# Altium PCB PCB1.PcbDoc
Units mil, origin at the board's own origin, x right, y up, seen from the top; angles counter-clockwise.
Board outline 2310 x 2715 mil, 2 copper layers (Top Layer, Bottom Layer); 65 components, 55 nets, 271 pads, 54 vias.
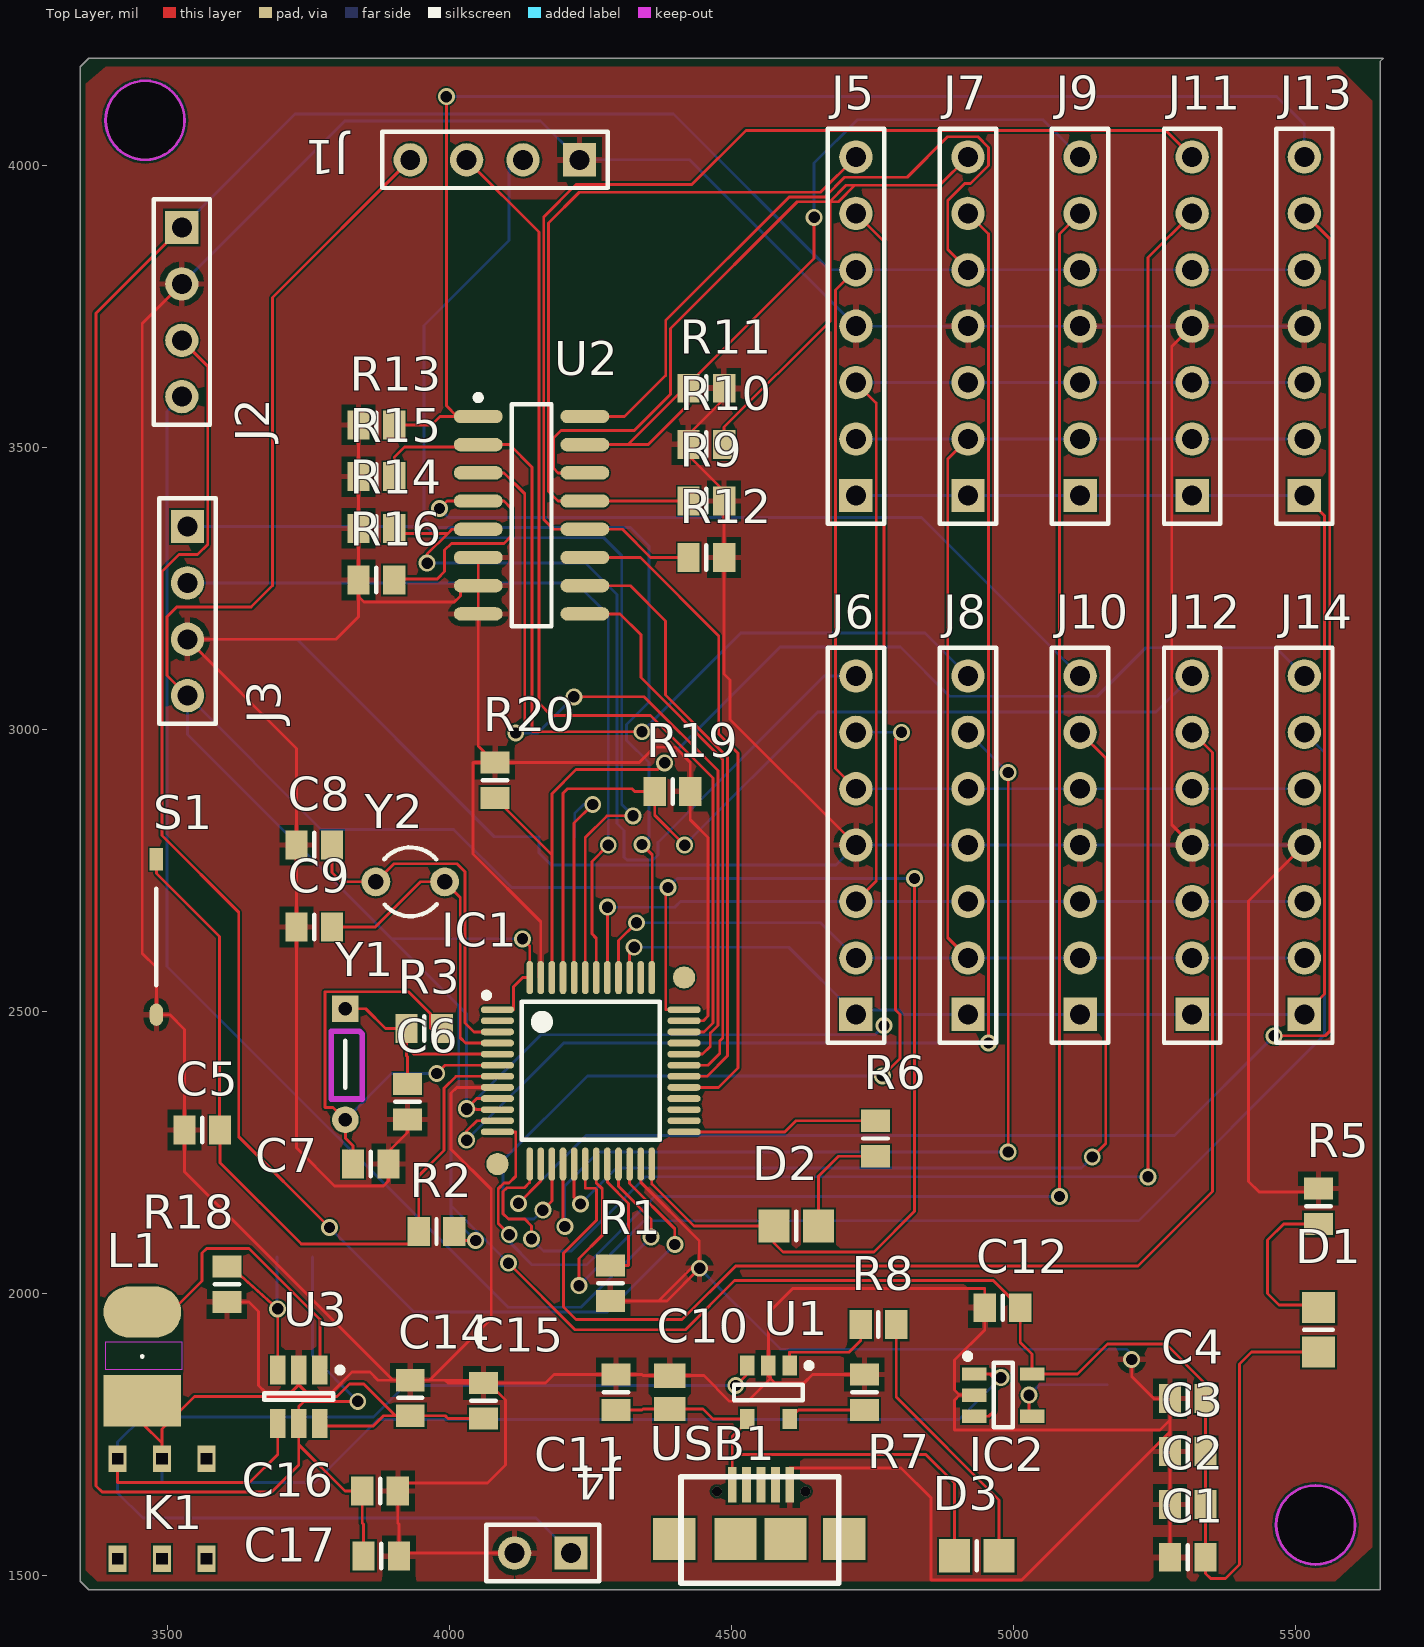
[diagram p0: Top Layer view]
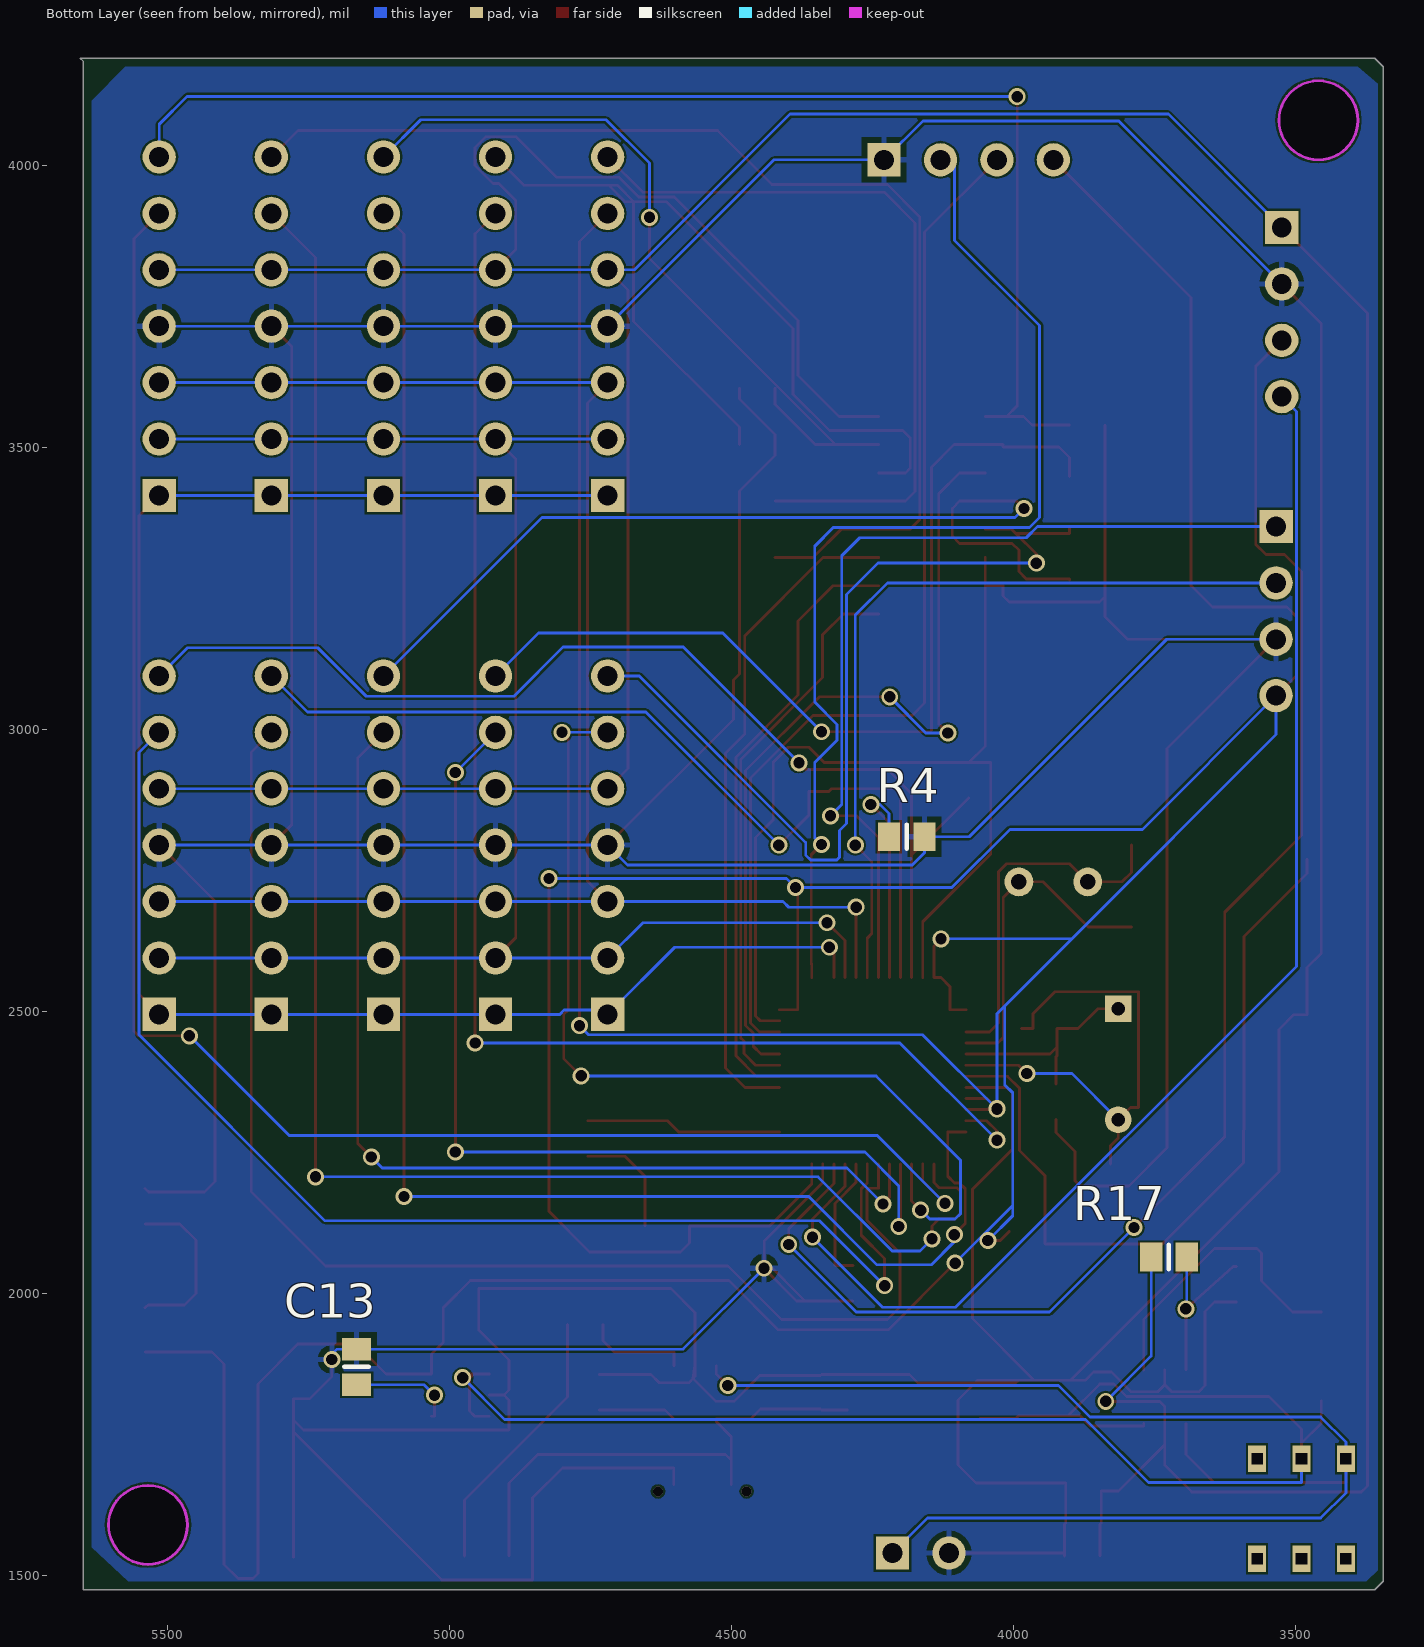
[diagram p1: Bottom Layer view, seen from below]

## Layer stack, top to bottom
Top Solder: solder mask 0.4, Solder Resist, Dk 3.5
Top Layer: signal copper 1.4
Dielectric 1: dielectric 12.6, FR-4, Dk 4.8
Bottom Layer: signal copper 1.4
Bottom Solder: solder mask 0.4, Solder Resist, Dk 3.5

## Board outline
3345,1490 3345,4175 3360,4190 5655,4190 5650,4185 5650,1475 3360,1475

## Design rules (kind name [scope] priority, off if disabled: settings)
Clearance [All] p1: gap=3.5 ignorepadtopadclearanceinfootprint=TRUE except(0: Arc-Hole Track-Hole SMDPad-Hole THPad-Hole Via-Hole Fill-Hole Poly-Hole Region-Hole Text-Hole; 10: Arc-SMDPad Arc-Via Track-SMDPad Track-Via SMDPad-Via Via-Via)
PolygonConnect [All] p1: connectstyle=Relief reliefconductorwidth=10 reliefentries=4 polygonreliefangle="90 Angle" airgapwidth=10
RoutingVias [All] p1: holewidth=20 width=30 viastyle="Through Hole" minholewidth=15 minwidth=30 maxholewidth=20 maxwidth=50
SolderMaskExpansion [All] p1: expansion=4
Width Width_2 [All] p1: maxlimit=5 minlimit=5 preferedwidth=5 minimp=50.000000 maximp=50.000000 favimp=50.000000
30 further rules are at their usual default settings.

## Components (designator, comment, footprint, x,y, rotation, side; value= is the part's Value field where it differs from the comment)
C1 "Cap Semi" 6-0805_L 5308.5,1532.5 r0 top value=104
C2 "Cap Semi" 6-0805_L 5308.5,1626.25 r0 top value=1uf
C3 "Cap Semi" 6-0805_L 5308.5,1720 r0 top value=104
C4 "Cap Semi" 6-0805_L 5308.5,1813.75 r0 top value=104
C5 "Cap Semi" 6-0805_L 3561.5,2290 r0 top value=104
C6 "Cap Semi" 6-0805_L 3925,2340 r90 top value=22pF
C7 "Cap Semi" 6-0805_L 3860,2230 r180 top value=22pF
C8 "Cap Semi" 6-0805_L 3760,2795 r0 top value=22pF
C9 "Cap Semi" 6-0805_L 3760,2650 r0 top value=22pF
C10 "Cap Pol3" C0805 4390,1825 r90 top value=1uF
C11 "Cap Semi" 6-0805_L 4295,1825 r270 top value=104
C12 "Cap Semi" 6-0805_L 4980,1975 r0 top value=2.2uF
C13 "Cap Semi" 6-0805_L 5165,1870 r270 bottom value=470pF
C14 "Cap Semi" 6-0805_L 3930,1815 r270 top value=10uF
C15 "Cap Semi" 6-0805_L 4060,1810 r270 top value=0.1uF
C16 "Cap Semi" 6-0805_L 3876.5,1650 r180 top value=0.1uf
C17 "Cap Semi" 6-0805_L 3878.5,1535 r180 top value=22uf
D1 "LED" 6-0805_M 5540,1935.63 r90 top
D2 "LED" 6-0805_M 4614.37,2120 r0 top
D3 "LED" 6-0805_M 4934.37,1535 r0 top
IC1 "STM32F103C8T6" LQFP48 4250,2395 r0 top
IC2 "MIC5205-3.3" SOT-23-5 4981.18,1820 r0 top
J1 "CON4" HDR1X4 4230,4010 r180 top
J2 "蓝牙" HDR1X4 3525,3890 r270 top
J3 "MPU6050" HDR1X4 3535,3360 r270 top
J4 "BAT" HDR1X2 4215,1540 r180 top
J5 "CON7" HDR1X7 4720,3415 r90 top
J6 "CON7" HDR1X7 4720,2495 r90 top
J7 "CON7" HDR1X7 4918.75,3415 r90 top
J8 "CON7" HDR1X7 4918.75,2495 r90 top
J9 "CON7" HDR1X7 5117.5,3415 r90 top
J10 "CON7" HDR1X7 5117.5,2495 r90 top
J11 "CON7" HDR1X7 5316.25,3415 r90 top
J12 "CON7" HDR1X7 5316.25,2495 r90 top
J13 "CON7" HDR1X7 5515,3415 r90 top
J14 "CON7" HDR1X7 5515,2495 r90 top
K1 "BUTTON" switch 3568.74,1707.17 r270 top
L1 "10UH" 0850 3455,1810 r90 top
R1 "Res3" 6-0805_L 4285,2018.5 r270 top value=10K
R2 "Res3" 6-0805_L 3976.5,2110 r0 top value=10K
R3 "Res3" 6-0805_L 3955,2470 r0 top value=10M
R4 "Res3" 6-0805_L 4190,2810 r0 bottom value=10K
R5 "Res3" 6-0805_L 5540,2155 r270 top value=1K
R6 "Res3" 6-0805_L 4755,2275 r270 top value=1K
R7 "Res3" 6-0805_L 4735,1825 r90 top value=330
R8 "Res3" 6-0805_L 4760,1945 r0 top value=330
R9 "Res3" 6-0805_L 4455,3405 r180 top value=10K
R10 "Res3" 6-0805_L 4455,3505 r0 top value=10K
R11 "Res3" 6-0805_L 4455,3605 r180 top value=10K
R12 "Res3" 6-0805_L 4455,3305 r180 top value=10K
R13 "Res3" 6-0805_L 3870,3540 r0 top value=10K
R14 "Res3" 6-0805_L 3870,3356.67 r0 top value=10K
R15 "Res3" 6-0805_L 3870,3448.33 r0 top value=10K
R16 "Res3" 6-0805_L 3870,3265 r0 top value=10K
R17 "Res3" 6-0805_L 3725,2065 r180 bottom value=525K
R18 "Res3" 6-0805_L 3605,2016.5 r270 top value=100k
R19 "Res3" 6-0805_L 4395,2890 r180 top value=10K
R20 "Res3" 6-0805_L 4080,2910 r270 top value=10K
S1 "KEY_2P" SOP2 3480,2770 r270 top
U1 "PW4054" SOT-23-CT5_L 4565,1825 r270 top
U2 "CD4051BCM" M16A_N 4145,3380 r0 top
U3 "PS7516" SOT23-6_M 3732.4,1817.24 r270 top
USB1 "MICRO USB" "MICRO USB" 4548.74,1613.23 r0 top
Y1 "XTAL_8M" xtal 3815,2505 r270 top
Y2 "XTAL_32.768K" R38 3930,2730 r90 top

## Footprints (in the part's own frame and the unit in brackets; to place one, negate y for a bottom-side part, rotate by r counter-clockwise, add the part's x,y. Pads: shape width x height; smd on the part's side, far side on the other; paste and mask are expansions set on the pad)
6-0805_L [mm] "Chip Resistor, Body 2.0x1.2mm, IPC High Density"
  rect 1x1.3 smd: 1(-0.8,0) 2(0.8,0)
  silkscreen extent 0,-0.55 0,0.55, body extent -1.07,-0.7 1.07,0.7, height 0.7
6-0805_M [mm] "Chip Resistor, Body 2.0x1.2mm, IPC Low Density"
  rect 1.4x1.5 smd: 1(-1,0) 2(1,0)
  silkscreen extent 0,-0.65 0,0.65, body extent -1.07,-0.7 1.07,0.7, height 0.7
0850 [mm]
  rect 2.3x3.5 smd: 1(0,0)
  oval 2.3x3.5 smd: 2(4,0)
  silkscreen extent 1.99,0 2.01,0
C0805 [mm] "Chip Capacitor, Body 2.0x1.3mm, IPC High Density"
  rect 1.1x1.4 smd: 1(-0.75,0) 2(0.75,0)
  body extent -1.1,-0.72 1.1,0.72, height 1.4
HDR1X2 [mm] "Connector; Header; 2 Position"
  rect 1.5x1.5 hole 0.9: 1(0,0)
  round 1.5 hole 0.9: 2(2.54,0)
  silkscreen extent -1.27,-1.27 3.81,1.27
HDR1X4 [mm] "Connector; Header; 4 Position"
  rect 1.5x1.5 hole 0.9: 1(0,0)
  round 1.5 hole 0.9: 2(2.54,0) 3(5.08,0) 4(7.62,0)
  silkscreen extent -1.27,-1.27 8.89,1.27, body extent -1.27,-1.27 8.89,1.27, height 8.38
HDR1X7 [mm] "Connector; Header; 7 Position"
  rect 1.5x1.5 hole 0.9: 1(0,0)
  round 1.5 hole 0.9: 2(2.54,0) 3(5.08,0) 4(7.62,0) 5(10.16,0) 6(12.7,0) 7(15.24,0)
  silkscreen extent -1.27,-1.27 16.51,1.27
LQFP48 [mm]
  oval 1.5x0.3 smd: 1(-4.2,2.75) 2(-4.2,2.25) 3(-4.2,1.75) 4(-4.2,1.25) 5(-4.2,0.75) 6(-4.2,0.25) 7(-4.2,-0.25) 8(-4.2,-0.75) 9(-4.2,-1.25) 10(-4.2,-1.75) 11(-4.2,-2.25) 12(-4.2,-2.75) 25(4.2,-2.75) 26(4.2,-2.25) 27(4.2,-1.75) 28(4.2,-1.25) 29(4.2,-0.75) 30(4.2,-0.25) 31(4.2,0.25) 32(4.2,0.75) 33(4.2,1.25) 34(4.2,1.75) 35(4.2,2.25) 36(4.2,2.75)
  oval 0.3x1.5 smd: 13(-2.75,-4.2) 14(-2.25,-4.2) 15(-1.75,-4.2) 16(-1.25,-4.2) 17(-0.75,-4.2) 18(-0.25,-4.2) 19(0.25,-4.2) 20(0.75,-4.2) 21(1.25,-4.2) 22(1.75,-4.2) 23(2.25,-4.2) 24(2.75,-4.2) 37(2.75,4.2) 38(2.25,4.2) 39(1.75,4.2) 40(1.25,4.2) 41(0.75,4.2) 42(0.25,4.2) 43(-0.25,4.2) 44(-0.75,4.2) 45(-1.25,4.2) 46(-1.75,4.2) 47(-2.25,4.2) 48(-2.75,4.2)
  round 1 smd: 49(-4.2,-4.2) 50(4.2,4.2)
  silkscreen extent -4.82,-3.1 3.1,3.52, body extent -4.49,-4.5 4.5,4.5, height 1.6
M16A_N [mm] "SOIC, 16-Leads, Body 9.9x3.9mm, Pitch 1.27mm, IPC Medium Density"
  oval 2.2x0.6 smd: 1(-2.4,4.445) 2(-2.4,3.175) 3(-2.4,1.905) 4(-2.4,0.635) 5(-2.4,-0.635) 6(-2.4,-1.905) 7(-2.4,-3.175) 8(-2.4,-4.445) 9(2.4,-4.445) 10(2.4,-3.175) 11(2.4,-1.905) 12(2.4,-0.635) 13(2.4,0.635) 14(2.4,1.905) 15(2.4,3.175) 16(2.4,4.445)
  silkscreen extent -2.52,-5 0.9,5.42, body extent -2,-5 2,5, height 1.75
"MICRO USB" [mm]
  rect 0.4x1.6 smd: 1(-1.216,1.214) 2(-0.575,1.225) 3(0.075,1.225) 4(0.725,1.225) 5(1.375,1.225)
  rect 1.9x1.9 smd: ""(-3.825,-1.225) ""(-1.075,-1.225) ""(1.175,-1.225) ""(3.825,-1.225)
  silkscreen extent -3.53,-3.22 3.57,1.58, body extent -4.43,-3.77 4.38,1.82, height 2.54
R38 [mm] "Crystal, Thru-Hole; 2 Leads; Body 3.1 x 8.2 mm (Dia.xH)"
  round 1.3 hole 0.7: 1(0,1.55) 2(0,-1.55)
  silkscreen extent -1.55,-1.19 1.55,1.17
SOP2 [mm]
  rect 1x0.6 smd: 1(0,0)
  oval 1x0.6 smd: 2(7,0)
  silkscreen extent 1.34,0 5.67,0
SOT23-6_M [mm] "SOT23, 6-Leads, Body 2.9x1.6mm, Pitch 0.95mm, Lead Span 2.7mm, IPC Low Density"
  rect 1.3x0.7 smd: 1(-1.2,0.95) 2(-1.2,0) 3(-1.2,-0.95) 4(1.2,-0.95) 5(1.2,0) 6(1.2,0.95)
  silkscreen extent -1.32,-1.55 0.15,1.98, body extent -0.9,-1.55 0.9,1.55, height 1.45
SOT-23-5 [mm]
  rect 1.1x0.6 smd: 1(-1.3,0.95) 2(-1.3,0) 3(-1.3,-0.95) 4(1.3,-0.95) 5(1.3,0.95)
  silkscreen extent -1.72,-1.45 0.42,1.87, body extent -1.37,-1.45 1.43,1.45, height 1.45
SOT-23-CT5_L [mm] "SOT23, 5-Leads, Body 2.9x1.6mm, Pitch 0.95mm, Lead Span 2.7mm, IPC High Density"
  rect 0.9x0.65 smd: 1(-1.2,0.95) 2(-1.2,0) 3(-1.2,-0.95) 4(1.2,-0.95) 5(1.2,0.95)
  silkscreen extent -1.32,-1.55 0.35,1.95, body extent -0.9,-1.55 0.9,1.55, height 1.45
switch [mm]
  rect 1.2x0.8 hole 0.5 square: 1(0,0) 2(0,-2) 3(0,-4) 4(4.5,0) 5(4.5,-2) 6(4.5,-4)
xtal [mm]
  rect 1.2x1.2 hole 0.6: 1(0,0)
  round 1.2 hole 0.6: 2(5,0)
  silkscreen extent 1.43,0 3.56,0

## Part data
C1 C2 C3 C4 C5 C6 C7 C8 C9 C11 C12 C13 C14 C15 C16 C17: "Capacitor (Semiconductor SIM Model)", LatestRevisionDate=29-May-2009, LatestRevisionNote="IPC-7351 Footprint Added.", PackageDescription="Chip Capacitor", PackageReference=C1206, Published=8-Jun-2000, Publisher="Altium Limited"
C10: "Polarized Capacitor (Surface Mount)", LatestRevisionDate=29-May-2009, LatestRevisionNote="IPC-7351 Footprint Added.", PackageDescription="Chip Capacitor", PackageReference=C0805, Published=8-Jun-2000, Publisher="Altium Limited"
IC1: "单片机", ComponentLink1Description="Manufacturer Link", ComponentLink1URL=www.st.com/stm32, ComponentLink2Description=Datasheet, ComponentLink2URL=http://www.st.com/stonline/products/literature/ds/13587.pdf, DatasheetVersion="rev6, Mar-2008", PackageDescription="48-Pin Low-Profile Quad Flat Pack, 7 x 7 mm Body, 0.5 mm Pitch (LQFP48)", PackageReference=LQFP48, PackageVersion=Mar-2008, Published=30-May-2008, Publisher="Altium Limited"
IC2: "稳压"
J1: "连接器"
J2 J3: library part CON4, "Connector"
J4: library part CON2, "Conjunctor"
J5 J6 J7 J8 J9 J10 J11 J12 J13 J14: "Connector"
K1: "自锁按键"
L1: library part Inductor, "电感"
R1 R2 R3 R4 R5 R6 R7 R8 R9 R10 R11 R12 R13 R14 R15 R16 R17 R18 R19 R20: "Resistor", LatestRevisionDate=29-May-2009, LatestRevisionNote="IPC-7351 Footprint Added.", PackageDescription="Chip Resistor", PackageReference=J1-0603, Published=8-Jun-2000, Publisher="Altium Limited"
S1: "轻触按键2P"
U2: "8-Channel Analog Multiplexer/Demultiplexer", Code_IPC=SOIC127P600-16, ComponentLink1Description="Manufacturer Link", ComponentLink1URL=http://www.fairchildsemi.com/, ComponentLink2Description=Datasheet, ComponentLink2URL=http://www.fairchildsemi.com/ds/CD%2FCD4052BC.pdf, DatasheetVersion=Jan-1999, LatestRevisionDate=13-Apr-2006, LatestRevisionNote="IPC-7351 Footprint Added.", PackageDescription="16-Pin Small Outline Integrated Circuit 1.27 mm Pitch", PackageReference=M16A, PackageVersion=2000, Published=17-Jul-2002, Publisher="Altium Limited"
Y1 Y2: library part XTAL, "Crystal Oscillator", LatestRevisionDate=17-Jul-2002, LatestRevisionNote="Re-released for DXP Platform.", PackageDescription="Crystal, Thru-Hole; 2 Leads; Body 3.1 x 8.2 mm (Dia.xH)", PackageReference=R38, Published=8-Jun-2000, Publisher="Altium Limited"

## Free pads (board coordinates)
  rect 47.24x31.5 hole 140: ""(3460,4080) ""(5535,1590)

## Via types
v1: diameter 30, hole 20, Top Layer to Bottom Layer, 52 vias
v2: diameter 17.72, hole 17.72, Top Layer to Bottom Layer, 2 vias

## Nets (pads, with @x,y where several pads share a name; then routed paths per layer and width w, separated by ;. In a path a pad name is that pad's centre, name@x,y a point inside that pad or via, vN(x,y) a via of type N, cw(c..) or ccw(c..) an arc to the next point about the centre after c; other vN are vias at no path point)
+5: C16.2 C17.2 J2.1 J5.5 J6.5 J7.5 J8.5 J9.5 J10.5 J11.5 J12.5 J13.5 J14.5 R17.1 U2.16 U3.5 | length 8627.4
  Top Layer w5: J2.1 3373,3738 3373,1659 3384,1648 3684.4,1648 3732.4,1696 3732.4,1732 ; v1(3837,1809) 3741.4,1809 3732.4,1800 U3.5 3732.4,1732 ; C17.2 3847.01,1591 3845,1593.01 C16.2 3814.4,1650 3732.4,1732 ; U2.16 4310,3555 4382.82,3627.82 4382.82,3724.82 4602,3944 4665,3944 4700,3979 4811,3979 4883,4051 4936,4051 4955,4032 4955,4000 4923,3968 4913,3968 4883,3938 4883,3850.75 J7.5 ; J6.5 4684,2931 4684,3779 J5.5
  Bottom Layer w5: J2.1 3726,4091 4396.74,4091 4672.74,3815 J5.5 J7.5 J9.5 J11.5 J13.5 ; R17.1 3756.5,1889.5 v1(3837,1809) ; J6.5 J8.5 J10.5 J12.5 J14.5
ADC0: IC1.10 J5.6 | length 2317
  Top Layer w5: v1(4030,2327) 4046,2327 4046.9,2326.1 IC1.10 ; J5.6 4770,3865 v1(4770,2475)
  Bottom Layer w5: v1(4030,2327) 4162,2459 4754,2459 v1(4770,2475)
ADC1: IC1.11 J7.6 | length 2560.5
  Top Layer w5: v1(4030,2272) 4030,2288 4048.42,2306.42 IC1.11 ; J7.6 4955,3878.75 v1(4955,2444.1)
  Bottom Layer w5: v1(4030,2272) 4202.1,2444.1 v1(4955,2444.1)
ADC2: IC1.12 J9.6 | length 3054.1
  Top Layer w5: IC1.12 4117,2286.73 4117,2208 4105,2196 4096,2196 4086,2186 4086,2124 v1(4105.5,2104.5) ; v1(5081,2172) 5081,3878.5 J9.6
  Bottom Layer w5: v1(4105.5,2104.5) 4105.5,2091.88 4146.38,2051 4242.5,2051 4363.5,2172 v1(5081,2172)
ADC3: IC1.13 J11.6 | length 3105.2
  Top Layer w5: IC1.13 4141.73,2197 4132.23,2187.5 4101,2187.5 4094.5,2181 4094.5,2141.5 4104,2132 4133,2132 4145,2120 v1(4145,2097) ; v1(5238,2207) 5238,3836.75 J11.6
  Bottom Layer w5: v1(4145,2097) 4166.5,2075.5 4215.5,2075.5 4347,2207 v1(5238,2207)
ADC4: IC1.14 J13.6 | length 3118.9
  Top Layer w5: v1(4122,2160) 4161.42,2199.42 IC1.14 ; v1(5461.57,2457) 5552,2457 5560,2465 5560,3870 J13.6
  Bottom Layer w5: v1(4122,2160) 4242,2280 5284.57,2280 v1(5461.57,2457)
ADC5: IC1.15 J6.6 | length 1709.6
  Top Layer w5: v1(4165.1,2148) 4181.1,2164 IC1.15 ; v1(4767,2386) 4798,2417 4798,2495 4790,2503 4790,2984 v1(4801,2995)
  Bottom Layer w5: v1(4165.1,2148) 4149.1,2132 4104,2132 4094.5,2141.5 4094.5,2236.5 4244,2386 v1(4767,2386) ; J6.6 v1(4801,2995)
ADC6: IC1.16 J8.6 | length 1768.3
  Top Layer w5: IC1.16 4200.79,2122.21 v1(4204,2119) ; v1(4990,2251) v1(4990,2923.75)
  Bottom Layer w5: v1(4204,2119) 4204,2191 4264,2251 v1(4990,2251) ; J8.6 v1(4990,2923.75)
ADC7: IC1.17 J10.6 | length 1798.6
  Top Layer w5: IC1.17 4220.47,2170.53 v1(4232,2159) ; J10.6 5163,2949.5 5163,2266 v1(5139,2242)
  Bottom Layer w5: v1(4232,2159) 4295.74,2222.74 5119.74,2222.74 v1(5139,2242)
ADC8: IC1.18 J12.6 | length 2378.3
  Top Layer w5: IC1.18 4240.16,2186.92 4257.25,2186.92 4260,2184.18 4260,2130 4201.5,2071.5 4201.5,1976.5 4224,1954 4412,1954 4507,2049 5220,2049 5352,2181 5352,2959.25 J12.6
ADC9: IC1.19 J14.6 | length 2294.4
  Top Layer w5: v1(4229,2014) 4229,2062 4270.41,2103.41 4270.41,2185.79 4259.84,2196.36 IC1.19
  Bottom Layer w5: v1(4229,2014) 4344,2129 5221,2129 5551,2459 5551,2959 J14.6
Address_0: IC1.29 U2.11 | length 1185.1
  Top Layer w5: U2.11 4338,3305 4477,3166 4477,2992 4511,2958 4511,2400 4476.47,2365.47 IC1.29
Address_1: IC1.30 U2.10 | length 1077.6
  Top Layer w5: U2.10 4320,3255 4382.42,3192.58 4382.42,3060.92 4492.5,2950.84 4492.5,2421.69 4455.97,2385.16 IC1.30
Address_2: IC1.31 U2.9 | length 991.4
  Top Layer w5: U2.9 4302,3205 4339,3168 4339,3092.09 4484,2947.09 4484,2453.12 4478.59,2447.71 4478.59,2425.59 4457.84,2404.84 IC1.31
Address_3: IC1.39 J5.1 J6.1 J7.1 J8.1 J9.1 J10.1 J11.1 J12.1 J13.1 J14.1 | length 3045.3
  Top Layer w5: IC1.39 4318.9,2605.9 v1(4327,2614) ; J14.1 5551,2531 5551,3379 J13.1
  Bottom Layer w5: v1(4327,2614) 4601,2614 J6.1 4727.5,2502.5 4797.5,2502.5 4805,2495 J8.1 J10.1 J12.1 J14.1 ; J5.1 J7.1 J9.1 J11.1 J13.1
Address_4: IC1.40 J5.2 J6.2 J7.2 J8.2 J9.2 J10.2 J11.2 J12.2 J13.2 J14.2 | length 3064.8
  Top Layer w5: IC1.40 4299.21,2625.71 v1(4331,2657.5) ; J8.2 4883,2630.75 4883,3479.25 J7.2
  Bottom Layer w5: v1(4331,2657.5) 4657.5,2657.5 J6.2 J8.2 J10.2 J12.2 J14.2 ; J5.2 J7.2 J9.2 J11.2 J13.2
Address_5: IC1.41 J5.3 J6.3 J7.3 J8.3 J9.3 J10.3 J11.3 J12.3 J13.3 J14.3 | length 3109.1
  Top Layer w5: IC1.41 v1(4279.53,2685) ; J6.3 4756,2731 4756,3579 J5.3
  Bottom Layer w5: v1(4279.53,2685) 4399,2685 4409,2695 J6.3 J8.3 J10.3 J12.3 J14.3 ; J5.3 J7.3 J9.3 J11.3 J13.3
BAT: J4.1 K1.3 U1.3 U3.4 | length 2508.5
  Top Layer w5: K1.3@3411.26,1695 3411.26,1665 3645,1665 3695,1715 U3.4 ; v1(4507,1837) 4527.6,1857.6 U1.3
  Bottom Layer w5: J4.1 4153,1602 3456,1602 3411.26,1646.74 3411.26,1695 3411.26,1736.76 3456,1781.5 3865,1781.5 3920.5,1837 v1(4507,1837)
BAT+: C14.2 C15.2 IC2.1 IC2.3 K1.2 L1.1 U3.6 | length 2680.6
  Top Layer w5: L1.1 3455,1770 3490,1735 ; K1.2@3490,1695 3490,1735 ; U3.6 3769.8,1765.5 3864.5,1765.5 3882.5,1783.5 3904,1783.5 ; C15.2 3997,1778.5 3992,1783.5 C14.2 3904,1783.5 ; IC2.3 4955.6,1782.6 4965,1792 4965,1849.4 4957,1857.4 ; IC2.1 4957,1857.4 ; v1(4977,1851) 4970.6,1857.4 4957,1857.4 ; 3490,1735 3490,1760 3547.5,1817.5 3800,1817.5 3822.5,1840 3847.5,1840 3904,1783.5
  Bottom Layer w5: K1.2@3490,1695 3490,1665 3761,1665 3873,1777 4903,1777 v1(4977,1851)
BOOT0: IC1.44 R4.2 | length 400
  Top Layer w5: IC1.44 4220.47,2833.98 v1(4253.5,2867)
  Bottom Layer w5: R4.2 4221.5,2851 4237.5,2867 v1(4253.5,2867)
BOOT1: IC1.20 R1.1 | length 227.2
  Top Layer w5: IC1.20 4279.53,2197.47 4317,2160 4317,2050 R1.1
Common_Out: IC1.32 U2.3 | length 1514.3
  Top Layer w5: U2.3 4096,3455 4133,3418 4133,3010 v1(4117,2994) ; v1(4220,3058) 4344.69,3058 4475.5,2927.19 4475.5,2475.5 4462,2462 4462,2438.53 4448,2424.53 IC1.32
  Bottom Layer w5: v1(4117,2994) 4156,2994 v1(4220,3058)
EX0: J5.7 R9.2 U2.13 | length 1324.9
  Top Layer w5: R9.2 U2.13 4192,3405 4175.18,3421.82 4175.18,3898.18 4229.5,3952.5 4657.5,3952.5 J5.7
EX1: J7.7 R10.2 U2.14 | length 1687.5
  Top Layer w5: U2.14 4192,3455 4183.68,3463.32 4183.68,3516.68 4197,3530 4327,3530 4391.32,3594.32 4391.32,3710.82 4616,3935.5 4674,3935.5 ; R10.2 4486.5,3536 4674,3723.5 4674,3935.5 ; J7.7 4868.75,3965 4718.5,3965 ; 4674,3935.5 4674,3936 4703,3965 4718.5,3965 ; 4674,3935.5 4689,3935.5 4718.5,3965
EX2: J9.7 R11.2 U2.15 | length 1408.6
  Top Layer w5: U2.15 4316,3505 ; R11.2 4423.5,3576.5 4352,3505 4316,3505 ; v1(4646,3908) 4646,3835 4316,3505
  Bottom Layer w5: v1(4646,3908) 4646,4004 4723,4081 5051.5,4081 J9.7
EX3: J11.7 R12.2 U2.12 | length 2053.6
  Top Layer w5: R12.2 4356,3305 4306,3355 U2.12 4184,3355 4166.68,3372.32 4166.68,3908.68 4224,3966 4429,3966 4525,4062 5269.25,4062 J11.7
EX4: J13.7 R13.2 U2.1 | length 2329.4
  Top Layer w5: R13.2 3968,3540 3983,3555 U2.1@4013,3555 ; v1(3994,4122) 3994,3574 U2.1@4013,3555 ; U2.1 U2.1@4013,3555
  Bottom Layer w5: v1(3994,4122) 5466,4122 5515,4073 J13.7
EX5: J6.7 R14.2 U2.5 | length 1621.1
  Top Layer w5: R14.2 3901.5,3347.69 3996.69,3347.69 ; v1(3960,3295) 3960,3311 3996.69,3347.69 ; U2.5 4004,3355 3996.69,3347.69
  Bottom Layer w5: v1(3960,3295) 4241,3295 4296.5,3239.5 4296.5,2833.5 4309,2821 4309,2773.5 4314,2768.5 4360,2768.5 4369,2777.5 4369,2800 4664,3095 J6.7
EX6: J8.7 R15.2 U2.2 | length 1651.4
  Top Layer w5: R15.2 3901.5,3482.5 3920,3501 4019,3501 4019,3505 U2.2 4106,3505 4146,3465 4146,2998 4148,2996 v1(4341,2996)
  Bottom Layer w5: v1(4341,2996) 4516,3171 4842.75,3171 J8.7
EX7: J10.7 R16.2 U2.4 | length 1708.5
  Top Layer w5: R16.2 3901.5,3267 3978,3267 3991,3280 3991,3318 4003,3330 4096,3330 4109,3343 4109,3392 4096,3405 U2.4 3995,3405 v1(3982,3392)
  Bottom Layer w5: v1(3982,3392) 3998,3376 4836.5,3376 J10.7
EX8: IC1.45 J12.7 R19.2 | length 1635.7
  Top Layer w5: IC1.45 4200.79,2887.04 4208.74,2895 4323,2895 4328,2890 R19.2 4363.5,2848 v1(4416.5,2795)
  Bottom Layer w5: v1(4416.5,2795) 4652.5,3031 5252.25,3031 J12.7
EX9: IC1.46 J14.7 R20.2 | length 2002.6
  Top Layer w5: R20.2 4181.1,2777.4 ; IC1.46 4181.1,2777.4 ; v1(4381,2941) 4369,2929 4224,2929 4181.1,2886.1 4181.1,2777.4
  Bottom Layer w5: v1(4381,2941) 4586,3146 4799,3146 4886,3059 5148,3059 5234,3145 5465,3145 J14.7
GND: C1.1 C2.1 C3.1 C4.1 C5.1 C6.1 C7.1 C8.1 C9.1 C10.2 C11.1 C12.1 C13.1 C14.1 C15.1 C16.1 C17.1 IC1.8 IC1.23 IC1.35 IC1.47 IC2.2 J1.1 J2.2 J3.3 J4.2 J5.4 J6.4 J7.4 J8.4 J9.4 J10.4 J11.4 J12.4 J13.4 J14.4 R1.2 R4.1 R5.1 R7.2 R9.1 R10.1 R11.1 R12.1 R13.1 R14.1 R15.1 R16.1 R18.2 R19.1 R20.1 S1.2 U1.2 U2.6 U2.7 U2.8 U3.2 USB1.5 | length 19989.8
  Top Layer w5: J2.2 3455,3720 3455,2603 3480,2578 S1.2 3504,2494.41 3530,2468.41 C5.1 3530,2216 3899.5,1846.5 ; R18.2 3644,1985 3661,1968 3661,1837 3672,1826 3720,1826 3732.4,1838.4 ; U3.2 3732.4,1838.4 ; R13.1 R15.1 R14.1 R16.1 3838.5,3235.5 ; C17.1 C17.1@3910,1540 ; C6.1 3925,2285.5 3891.5,2252 C7.1 3891.5,2200 3882.5,2191 3796,2191 3728.5,2258.5 C9.1 C8.1 3728.5,2966.5 J3.3 3798.5,3160 3838.5,3200 3838.5,3235.5 ; U2.6 U2.7 ; IC1.8 4012.47,2365.47 4002.5,2355.5 4002.5,2256 4073.5,2185 4073.5,1956 3964,1846.5 ; J4.2 C17.1@3910,1540 ; IC1.47 4161.42,2659.09 4041,2779.5 4041,2941.5 R20.1 ; R1.2 4370.01,1987.01 ; IC1.23 4338.58,2197.42 4442.5,2093.5 4442.5,2059.5 4370.01,1987.01 ; IC1.35 4449.58,2483.58 4458,2492 4458,2808.5 4426.5,2840 R19.1 4426.5,2942 4400,2968.5 4363,2968.5 4336,2941.5 R20.1 ; v1(4443,2045) 4385.01,1987.01 4370.01,1987.01 ; R11.1 4486.5,3585.99 4423.5,3523 R10.1 4423.5,3485.99 4486.5,3423 R9.1 R12.1 4486.5,3098.31 4497,3087.8 4497,3018 J6.4 ; USB1.5 4602.87,1691 4800,1691 4853,1638 4853,1492 5014,1492 5277.01,1755.01 ; R7.2 4643,1856.5 4628.5,1842 4576,1842 4568.5,1849.5 ; IC2.2 4904,1820 ; v1(5209,1883) 5209,1852.75 5248,1813.75 C4.1 5277.01,1776 ; C1.1 C2.1 C3.1 5277.01,1755.01 ; J12.4 5280,2831.25 5280,3678.75 J11.4 ; J14.4 5416,2696 5416,2199 5435,2180 5533.5,2180 R5.1 ; 3732.4,1838.4 3744.8,1826 3792,1826 3827,1861 3858.5,1861 3873,1846.5 3899.5,1846.5 ; 3838.5,3235.5 3848,3226 4008,3226 4019,3237 4019,3255 U2.7 ; 3899.5,1846.5 C14.1 3964,1846.5 ; C17.1@3910,1540 3910,1591 3907.99,1593.01 C16.1 3907.99,1664 4067,1664 4099,1696 4099,1811.5 C15.1@4069,1841.5 ; 3964,1846.5 3992,1846.5 ; 3992,1846.5 4064,1846.5 C15.1@4069,1841.5 ; 3992,1846.5 3997,1841.5 C15.1 C15.1@4069,1841.5 ; U2.7 U2.8 4050.51,2970.98 R20.1 ; C15.1@4069,1841.5 4170,1841.5 4185,1856.5 C11.1 4341,1856.5 4342.97,1854.53 C10.2 4450.5,1854.53 4496,1809.02 4528.02,1809.02 4568.5,1849.5 ; U1.2 4568.5,1849.5 ; U1.2 4565,1966 4608,2009 4948.5,2009 C12.1 4948.5,1935.5 4895,1882 4895,1829 4904,1820 ; U1.2 4565,1853 4568.5,1849.5 ; 4904,1820 4895,1811 4895,1758 5259.01,1758 5277.01,1776 ; 5277.01,1755.01 5277.01,1776
  Bottom Layer w5: J2.2 3814,4079 4161,4079 J1.1 4425,4010 J5.4 J7.4 J9.4 J11.4 J13.4 ; J3.3 3729,3160 4079,2810 R4.1 4158.5,2781.5 4180,2760 4685,2760 J6.4 J8.4 J10.4 J12.4 J14.4 ; v1(4443,2045) 4586.5,1901.5 C13.1 5200,1901.5 5209,1892.5 v1(5209,1883)
NetC13_2: C13.2 IC2.4 | length 188.4
  Top Layer w5: v1(5027,1820) 5027,1782.6 IC2.4
  Bottom Layer w5: v1(5027,1820) 5045.5,1838.5 C13.2
NetD1_2: D1.2 R5.2 | length 297.2
  Top Layer w5: D1.2 5535,1980 5470,1980 5450,2000 5450,2095 5478.5,2123.5 R5.2
NetD2_2: D2.2 R6.2 | length 204
  Top Layer w5: D2.2 4653.74,2208 4689.24,2243.5 R6.2
NetD3_2: D3.2 R8.2 | length 485.5
  Top Layer w5: R8.2 4791.5,1816.5 4973.74,1634.26 D3.2
NetIC1_34: IC1.34 J1.3 | length 1872.5
  Top Layer w5: J1.3 4158.18,3881.82 4158.18,3046.82 4180,3025 4356.05,3025 4467,2914.05 4467,2480 4450.9,2463.9 IC1.34
NetIC1_37: IC1.37 J1.2 | length 1951.1
  Top Layer w5: v1(4341,2796) 4359,2778 4359,2584.73 4358.27,2584 IC1.37
  Bottom Layer w5: J1.2 4105,4010 4105,3867 3954.5,3716.5 3954.5,3376 3972.5,3358 4320,3358 4353,3325 4353,3048.5 4313.5,3009 4313.5,2981 4353,2941.5 4353,2808 v1(4341,2796)
NetL1_2: L1.2 U3.1 | length 532.5
  Top Layer w5: L1.2 3506,1967.48 3561,2022.48 3561,2072 3569.18,2080.18 3644,2080.18 3769.8,1954.37 U3.1
NetR7_1: R7.1 U1.5 | length 139.1
  Top Layer w5: U1.5 4618.15,1793.5 R7.1
NetR8_1: R8.1 U1.1 | length 186.8
  Top Layer w5: U1.1 4602.4,1896 4708,1896 4728.5,1916.5 R8.1
NetR17_2: R17.2 R18.1 U3.3 | length 319.7
  Top Layer w5: R18.1 3611,2047.99 v1(3695,1973) U3.3
  Bottom Layer w5: R17.2 3693.5,1974.5 v1(3695,1973)
NRST: C5.2 IC1.7 R2.1 S1.1 | length 1394.6
  Top Layer w5: S1.1 3480,2745 3592,2633 3592,2290.99 C5.2 3592.99,2231.93 3736.93,2088 3945,2088 R2.1 3945,2209 3989.98,2253.98 3989.98,2364 4011.14,2385.16 IC1.7
PB12: IC1.25 R6.1 | length 347.8
  Top Layer w5: IC1.25 4594,2286.73 4613.76,2306.5 R6.1
POWER: C10.1 C11.2 D3.1 U1.4 USB1.1 | length 917
  Top Layer w5: C11.2 4341,1793.5 4342.97,1795.47 C10.1 4449,1795.47 4466.72,1777.76 U1.4 4527.6,1773 4500.87,1746.27 4500.87,1705 ; USB1.1 4500.87,1705 ; D3.1 4895,1664 4844,1715 4510.87,1715 4500.87,1705
RXD1: IC1.21 J2.4 | length 2334
  Top Layer w5: IC1.21 4299.21,2190.29 4357,2132.5 v1(4357,2100)
  Bottom Layer w5: J2.4 3499,3564 3499,2580 4103.15,1975.85 4232.85,1975.85 v1(4357,2100)
SCL: IC1.42 J3.2 | length 1427.5
  Top Layer w5: IC1.42 4259.84,2630 4252,2637.84 4252,2766 v1(4281,2795)
  Bottom Layer w5: J3.2 4224,3260 4281,3203 v1(4281,2795)
SDA: IC1.43 J3.1 | length 1609.8
  Top Layer w5: IC1.43 4240.16,2808.63 4278.53,2847 v1(4325,2847)
  Bottom Layer w5: J3.1 3958,3360 3978,3340 4273,3340 4305,3308 4305,2867 v1(4325,2847)
TXD1: IC1.22 J2.3 | length 2667.3
  Top Layer w5: J2.3 3571,3644 3571,3328 3553,3310 3520,3310 3490,3280 3490,2812 3626,2676 3626,2278 v1(3787,2117) ; IC1.22 4318.9,2195.1 4399,2115 v1(4399,2087)
  Bottom Layer w5: v1(3787,2117) 3936.65,1967.35 4279.35,1967.35 v1(4399,2087)
VCC3.3: C1.2 C2.2 C3.2 C4.2 C12.2 D1.1 D2.1 IC1.1 IC1.9 IC1.24 IC1.36 IC1.48 IC2.5 J1.4 J3.4 R2.2 | length 8545.9
  Top Layer w5: J3.4 3499,3096 3499,3200 3516,3217 3648,3217 3686,3255 3686,3766 J1.4 ; R2.2 4023.99,2094 v1(4046,2094) ; v1(4030,2328) 4047.79,2345.79 IC1.9 ; IC1.1 4113,2503.27 4113,2544 4129.35,2560.35 IC1.48 4141.73,2616.27 v1(4129,2629) ; v1(4104,2054) 4222,1936 4418,1936 4505,2023 4963.5,2023 C12.2 5011.5,1913.5 5032.36,1892.64 IC2.5 5112.91,1857.4 5166.01,1910.5 5269.5,1910.5 5340,1840 C4.2 C3.2 C2.2 C1.2 5340,1504 5349,1495 5375,1495 5400,1520 5400,1875 5421.26,1896.26 D1.1 ; IC1.24 4358.27,2194.5 4432.77,2120 D2.1 4575,2090 4591,2074 4752,2074 4824,2146 v1(4824,2736) ; v1(4387,2720) 4383,2716 4383,2503.27 IC1.36
  Bottom Layer w5: v1(4030,2328) 4030,2496 4016,2510 ; v1(4046,2094) 4002,2138 4002,2156 ; v1(4104,2054) 4002,2156 ; v1(4129,2629) 3897,2629 ; v1(4824,2736) 4403,2736 v1(4387,2720) 4110,2720 4007,2823 3772,2823 J3.4 3535,2991 3897,2629 ; 3897,2629 4016,2510 ; 4002,2156 4002,2356 4016,2370 4016,2510
XTAL_A: C6.2 IC1.5 R3.1 Y1.1 | length 388.4
  Top Layer w5: Y1.1 3851,2505 3886,2470 R3.1 3923.5,2437.02 ; C6.2 3925,2420 3923.5,2421.5 3923.5,2437.02 ; IC1.5 3936,2424.53 3923.5,2437.02
XTAL_B: C7.2 IC1.6 R3.2 Y1.2 | length 893.1
  Top Layer w5: C7.2 3828.5,2262 3815,2275.5 Y1.2 3793.15,2330 3779,2330 3779,2535 3927,2535 3966,2496 3966,2470 R3.2 ; v1(3977,2390) 3991.84,2404.84 IC1.6
  Bottom Layer w5: Y1.2 3896.85,2390 v1(3977,2390)
XTAL_C: C8.2 IC1.3 Y2.1 | length 642.3
  Top Layer w5: C8.2 3791.5,2746.5 3808,2730 Y2.1 3900.98,2762 4013,2762 4027.18,2747.82 4027.18,2479.72 4043,2463.9 IC1.3
XTAL_D: C9.2 IC1.4 Y2.2 | length 590.4
  Top Layer w5: C9.2 3868,2650 3948,2730 Y2.2 4018.68,2702.34 4018.68,2453.53 4028,2444.21 IC1.4
pads on no net: IC1.2 IC1.26 IC1.27 IC1.28 IC1.33 IC1.38 IC1.49 IC1.50 K1.1 K1.4 K1.5 K1.6 USB1. USB1.2 USB1.3 USB1.4
copper on no net:
  other v2: 4473.74,1649.23 4630.74,1649.23

## Polygon pours and split planes (outlines as drawn)
GND on Top Layer "Top Layer-GND" (solid, remove dead copper, pour order 6): 3390,4175 5575,4175 5630,4120 5635,4115 5635,1550 5570,1490 5540,1490 3375,1490 3355,1510 3355,4145
GND on Top Layer "Top Layer-GND 1" (solid, remove dead copper, pour order 4): 3345,4190
GND on Bottom Layer "Bottom Layer-GND" (solid, remove dead copper, pour order 8): 3390,4175 3395,4175 5575,4175 5635,4115 5635,1550 5570,1490 5565,1490 3375,1490 3355,1510 3355,4145

## Keep-outs
Top Layer:
  region: 3390,1915 3525,1915 3525,1865 3390,1865
  region: 4125,2520 4375,2520 4375,2270 4125,2270
  lines w10: 3790,2345 3790,2465 3840,2465 3845,2460 3845,2345 3790,2345
Keep-Out Layer:
  circle w5: c5535,1590 r70
  circle w5: c3460,4080 r70

## Other copper
Top Layer:
  pour cut-out: 4150.95,3898.24 4156.36,3898.24 4160.19,3902.06 4160.19,3911.37 4162.09,3913.27 4109.18,3940 4190,3940
  pour cut-out: 4650.59,3830.41 4651.5,3829.5
  pour cut-out: 4650.59,3830.41
  pour cut-out: 4657.54,3889.09 4656.01,3889.09 4652.49,3885.58 4654.23,3883.84 4667.51,3883.84 4667.51,3847.32 4650.59,3830.41 4651.5,3829.5 4674,3829.5
  pour cut-out: 3526.17,1978.46 3526.17,1969.66 3528.79,1967.04 3528.79,1915 3515.33,1915 3508.51,1921.82 3508.51,1928.79

## Silkscreen, mask and mechanical layers (free items; w line width, h text height)
Mechanical 1:
  lines w10: 3345,1490 3345,4165 3345,4175 3360,4190 3370,4190 5650,4190 5650,4185 5650,1475 3360,1475 3345,1490

## Text inside footprints (layer, text, board x,y; h text height)
IC2: Mechanical 15 "1" at 4998.9,1813.53 h29.53 r90